# Allegro board clk104_board_file.brd
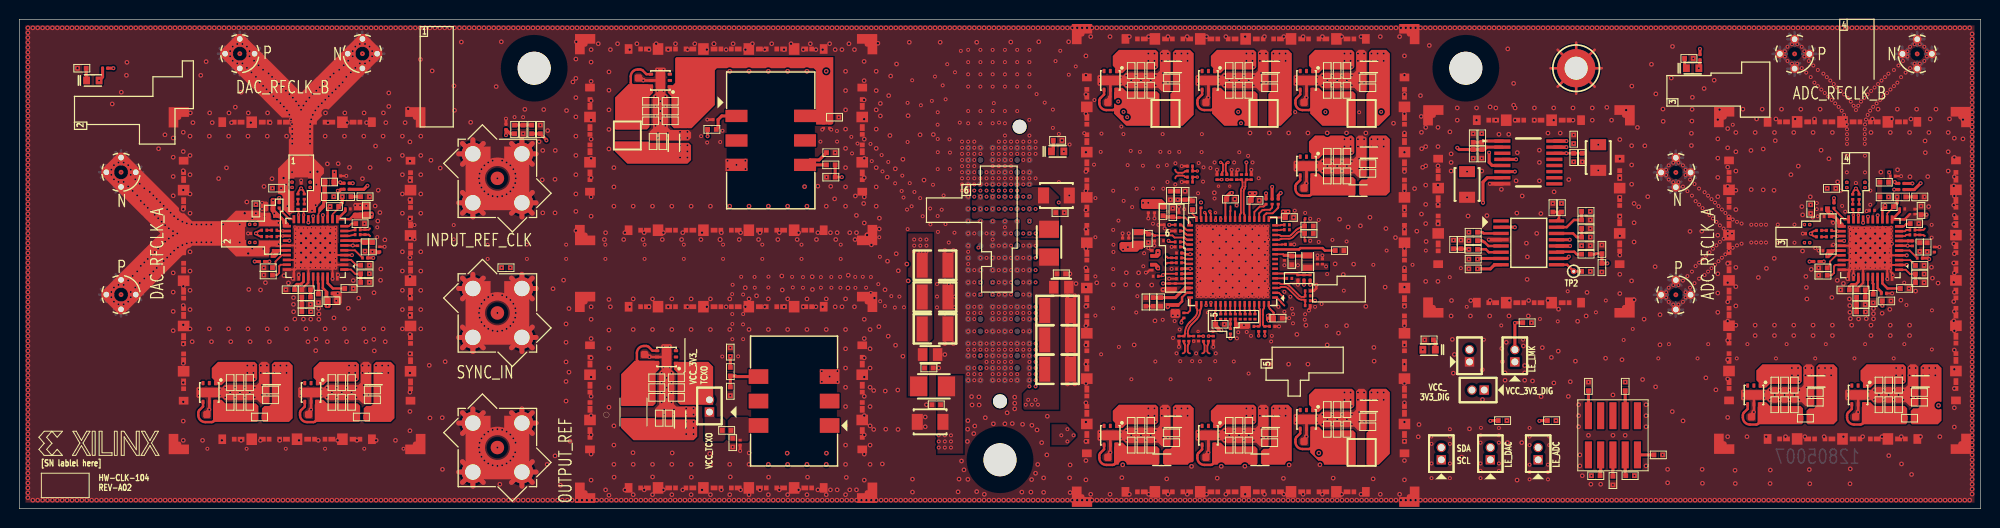
[diagram p0: board, top side]
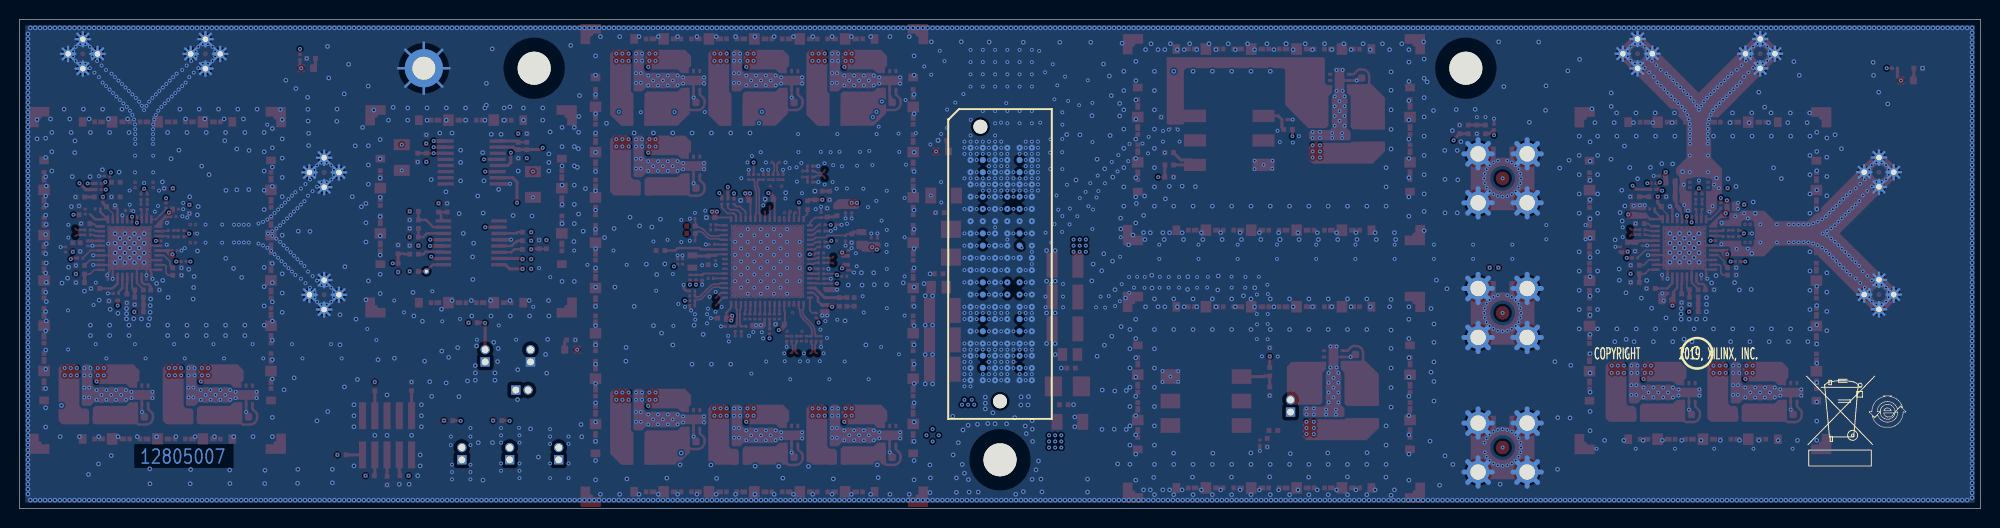
[diagram p1: board, bottom side, seen from below]

Outline 203.2 x 50.8 mm; copper layers: TOP, L02_CLK, L03_GND, L04_SIGNAL, L05_GND, L06_PWR, L07_GND, L08_PWR, L09_GND, L10_SIGNAL, L11_GND, BOTTOM. Coordinates in mm from the lower left corner of the outline.
Outline path: 0,50.8 203.2,50.8 203.2,0 0,0 0,50.8

## Design rules (mm)
constraint set DEFAULT: min track width 0.318
net group ADC_REFCLK_N: nets ADC_REFCLK_N DCLK_OUT12_N
net group ADC_REFCLK_P: nets ADC_REFCLK_P DCLK_OUT12_P
net group AMS_SYSREF_N: nets AMS_SYSREF_N SDCLK_OUT3_N
net group AMS_SYSREF_P: nets AMS_SYSREF_P SDCLK_OUT3_P
net group CLK_4208_IN0_CMOS: nets CLK_4208_IN0_CMOS CLK_IN1
net group CLK_4208_IN1_CMOS: nets CLK_4208_IN1_CMOS TCXO_OUT
net group CSB_H: nets CSB_H H_LE
net group DAC_REFCLK_N: nets DAC_REFCLK_N DCLK_OUT6_N
net group DAC_REFCLK_P: nets DAC_REFCLK_P DCLK_OUT6_P
net group DDR_PLY_CAP_SYNC_N: nets DCLK_OUT7_N DDR_PLY_CAP_SYNC_N
net group DDR_PLY_CAP_SYNC_P: nets DCLK_OUT7_P DDR_PLY_CAP_SYNC_P
net group LE_2594_ADC: nets LE_2594_ADC N21810055
net group LE_2594_DAC: nets LE_2594_DAC N21398582
net group LE_LMK04828: nets LE_LMK04828 N21879442
net group LMK04208_CPO2: nets LMK04208_CPO2 N20993068
net group LMK_MUXOUT: nets LMK_MUXOUT N21879514
net group MG5: nets SDCLK_OUT1_P SDCLK_OUT5_P
net group MUXOUT_RF2: nets MUXOUT_RF2 N21119393
net group N21162823: nets N21162823 N21825725
net group PL_CLK_N: nets DCLK_OUT8_N PL_CLK_N
net group PL_CLK_P: nets DCLK_OUT8_P PL_CLK_P
net group PL_SYSREF_N: nets PL_SYSREF_N SDCLK_OUT9_N
net group PL_SYSREF_P: nets PL_SYSREF_P SDCLK_OUT9_P
net group REFIN_2592B_IN_N: nets REFIN_2592B_IN_N REFIN_RF2_N
net group REFIN_2592B_IN_P: nets REFIN_2592B_IN_P REFIN_RF2_P
net group REFIN_RF1_IN_N: nets REFIN_RF1_IN_N REFIN_RF1_N
net group REFIN_RF1_IN_P: nets REFIN_RF1_IN_P REFIN_RF1_P
net group RF1_ADC_SYNC: nets RF1_ADC_SYNC RF1_ADC_SYNC_IN
net group RF2_ADC_SYNC_IN: nets RF2_ADC_SYNC_IN RF2_DAC_SYNC
net group SDCLK_OUT11: nets SDCLK_OUT11_N SDCLK_OUT11_P
net group SFP_REC_CLK_N: nets N22148580 SFP_REC_CLK_N
net group SFP_REC_CLK_P: nets N22148573 SFP_REC_CLK_P
net group STATUS_4208: nets N22068626 STATUS_4208
net group MUXOUT_RF1: nets MUXOUT_RF1 N21119355 RF_ADC_MUXOUT
net group OSCIN_4208_CMOS: nets OSCIN_4208_CMOS VCXO_OUT VCXO_OUT_ATT
net group RF1_OUTA_N: nets N21995692 RF1_2594_A_N RF1_OUTA_N
net group RF1_OUTA_P: nets N21995695 RF1_2594_A_P RF1_OUTA_P
net group RF1_OUTB_N: nets N22000306 RF1_2594_B_N RF1_OUTB_N
net group RF1_OUTB_P: nets N22000213 RF1_2594_B_P RF1_OUTB_P
net group RF2_OUTA_N: nets N22010941 RF2_2594_A_N RF2_OUTA_N
net group RF2_OUTA_P: nets N22010852 RF2_2594_A_P RF2_OUTA_P
net group RF2_OUTB_N: nets N22011759 RF2_2594_B_N RF2_OUTB_N
net group RF2_OUTB_P: nets N22011666 RF2_2594_B_P RF2_OUTB_P
net group SDCLK_OUT1_: nets SDCLK_OUT1_N
net group SDCLK_OUT5: nets SDCLK_OUT5_N
net group SE_CLKS: nets SDCLK11_AC
net group SYNC_IN: nets N22148641 N22917062 SYNC_IN SYNC_IN_SMA
net group VTUEN_VCXO: nets LMK04208_CPO1 N20993838 VTUEN_VCXO VTUNE_LMK
net group VTUNE_RF1: nets N21807365 N21807371 N21807441 VTUNE_RF1
net group VTUNE_RF2: nets N21808854 N21808860 N21808930 VTUNE_RF2

## Placement (name value [footprint] x y rotation side)
C1  0.1UF  [CAPC100X50X55]  162.31 27.3 0 top
C5  22UF  [CAPC320X160X180]  94.36 9.02 180 top
C6  100UF  [CAPC320X250X280]  94.87 21.97 0 top
C7  10UF  [CAPC200X125X155]  94.36 16 0 top
C8  0.1UF  [CAPC60X30X40]  127.13 34.42 90 top
C9  0.1UF  [CAPC60X30X40]  126.62 34.42 90 top
C21  0.1UF  [CAPC60X30X40]  134.49 25.65 90 top
C23  0.1UF  [CAPC60X30X40]  131.06 26.04 270 top
C24  0.1UF  [CAPC60X30X40]  128.4 18.67 270 top
C25  0.1UF  [CAPC60X30X40]  129.03 18.67 270 top
C26  0.1UF  [CAPC60X30X40]  117.6 30.99 270 top
C27  0.1UF  [CAPC60X30X40]  120.14 30.48 90 top
C31  0.1UF  [CAPC60X30X40]  117.6 28.07 270 top
C37  0.1UF  [CAPC60X30X40]  120.02 27.18 0 top
C39  0.1UF  [CAPC60X30X40]  125.48 18.41 270 top
C40  0.1UF  [CAPC60X30X40]  120.14 24.89 180 top
C41  1UF  [CAPC100X50X50]  84.46 40.64 0 top
C42  0.1UF  [CAPC60X30X40]  83.95 39.75 270 top
C43  1000PF  [0201]  83.31 39.75 270 top
C44  0.1UF  [CAPC60X30X40]  120.14 23.88 180 top
C45  0.1UF  [CAPC60X30X40]  117.35 25.02 270 top
C47  0.1UF  [CAPC60X30X40]  120.14 24.38 0 top
C48  0.1UF  [CAPC60X30X40]  119.76 23.11 270 top
C49  2200PF  [CAPC100X50X55]  117.47 21.46 270 top
C50  22PF  [CAPC100X50X56]  118.24 21.46 270 top
C51  10 uF  [CAPC100X50X70]  136.78 26.8 0 top
C52  0.1UF  [CAPC60X30X40]  131.44 27.43 0 top
C53  100pF  [CAPC60X30X33]  72.14 40.39 180 top
C54  0.68uF  [CAPC100X50X55]  120.02 32.51 90 top
C55  0.1UF  [CAPC100X50X55]  120.78 32.51 90 top
C56  0.1UF  [CAPC60X30X40]  120.02 20.83 270 top
C58  0.1UF  [CAPC60X30X40]  120.02 27.69 0 top
C60  0.1UF  [CAPC60X30X40]  120.02 29.46 0 top
C61  1UF  [CAPC100X50X50]  73.91 6.86 270 top
C62  0.1UF  [CAPC60X30X40]  74.68 6.86 270 top
C64  0.1UF  [CAPC60X30X40]  120.02 28.83 0 top
C67  0.1UF  [CAPC60X30X40]  186.98 31.09 180 top
C69  0.1UF  [CAPC60X30X40]  187.24 30.33 180 top
C70  0.1UF  [CAPC60X30X40]  187.82 30.05 270 top
C71  100pF  [CAPC60X30X33]  185.23 27.61 180 top
C74  0.1UF  [CAPC60X30X40]  193.17 22.35 0 top
C76  0.1UF  [CAPC60X30X40]  195.07 31.11 0 top
C78  0.1UF  [CAPC60X30X40]  187.82 27.05 90 top
C79  0.1UF  [CAPC60X30X40]  187.11 26.77 180 top
C80  0.1UF  [CAPC60X30X40]  191.94 30.97 180 top
C81  100pF  [CAPC60X30X33]  185.23 29.49 180 top
C82  0.1UF  [CAPC60X30X40]  196.13 27.54 270 top
C83  0.1UF  [CAPC60X30X40]  196.38 30.84 90 top
C84  1UF  [CAPC100X50X50]  196.34 29.59 180 top
C85  10 uF  [CAPC100X50X70]  192.06 21.82 90 top
C86  1UF  [CAPC100X50X50]  195.33 22.86 180 top
C91  10 uF  [CAPC100X50X70]  186.86 24.23 0 top
C92  10 uF  [CAPC100X50X70]  196.89 25.25 180 top
C93  1UF  [CAPC100X50X50]  186.86 25 0 top
C94  10 uF  [CAPC100X50X70]  189.14 22.71 0 top
C95  0.1UF  [CAPC60X30X40]  196.13 28.43 180 top
C96  0.1UF  [CAPC60X30X40]  196.13 28.93 180 top
C111  100pF  [CAPC60X30X33]  24.16 27.64 180 top
C115  0.1UF  [CAPC60X30X40]  26.75 30.08 270 top
C117  0.1UF  [CAPC60X30X40]  25.91 31.11 180 top
C118  100pF  [CAPC60X30X33]  24.16 29.51 180 top
C119  0.1UF  [CAPC60X30X40]  26.16 30.35 180 top
C123  0.1UF  [CAPC60X30X40]  26.04 26.8 180 top
C125  0.1UF  [CAPC60X30X40]  30.86 30.99 180 top
C128  0.1UF  [CAPC60X30X40]  26.75 27.08 90 top
C129  0.1UF  [CAPC60X30X40]  34.04 31.11 0 top
C130  0.1UF  [CAPC60X30X40]  35.05 27.56 270 top
C131  0.1UF  [CAPC60X30X40]  32.13 22.35 0 top
C132  0.1UF  [CAPC60X30X40]  35.31 30.86 90 top
C133  1UF  [CAPC100X50X50]  35.31 29.59 180 top
C134  10 uF  [CAPC100X50X70]  30.99 21.84 90 top
C135  1UF  [CAPC100X50X50]  34.16 22.86 180 top
C140  10 uF  [CAPC100X50X70]  25.78 24.26 0 top
C141  10 uF  [CAPC100X50X70]  35.81 25.27 180 top
C142  1UF  [CAPC100X50X50]  25.78 25.02 0 top
C143  10 uF  [CAPC100X50X70]  28.07 22.73 0 top
C144  0.1UF  [CAPC60X30X40]  35.05 28.45 180 top
C145  0.1UF  [CAPC60X30X40]  35.05 28.96 180 top
C163  1UF  [CAPC100X50X50]  107.82 30.73 0 top
C165  10UF  [CAPC200X125X155]  107.95 22.99 0 top
C166  1UF  [CAPC100X50X50]  107.95 24.38 0 top
C185  0.01UF  [CAPC60X30X33]  135 25.65 90 top
C186  1UF  [CAPC100X50X50]  131.83 25.78 270 top
C187  0.01UF  [CAPC60X30X33]  116.97 30.99 270 top
C188  10 uF  [CAPC100X50X70]  119.51 30.73 90 top
C190  0.01UF  [CAPC60X30X33]  114.3 27.81 90 top
C191  1UF  [CAPC100X50X50]  116.97 28.07 270 top
C196  0.01UF  [CAPC60X30X33]  117.35 26.54 90 top
C198  0.01UF  [CAPC60X30X33]  120.14 26.54 180 top
C200  0.01UF  [CAPC60X30X33]  119.13 23.11 270 top
C202  0.01UF  [CAPC60X30X33]  119.51 20.83 270 top
C278  100pF  [CAPC60X30X33]  185.33 28.55 180 top
C279  0.1UF  [CAPC100X50X55]  161.04 38.35 90 top
C280  0.1UF  [CAPC60X30X40]  133.48 21.59 0 top
C281  0.1UF  [CAPC60X30X40]  133.48 22.1 0 top
C282  0.1UF  [CAPC60X30X40]  125.09 34.42 90 top
C283  0.1UF  [CAPC60X30X40]  124.59 34.42 90 top
C284  0.1UF  [CAPC60X30X40]  122.68 17.65 270 top
C285  0.1UF  [CAPC60X30X40]  123.19 17.65 270 top
C302  100pF  [CAPC60X30X33]  189.33 33.59 90 top
C303  100pF  [CAPC60X30X33]  190.27 33.49 90 top
C305  100pF  [CAPC60X30X33]  191.21 33.59 90 top
C306  390PF  [0402]  193.71 31.35 180 top
C307  1800PF  [CAPC100X50X55]  190.79 22.71 0 top
C308  1800PF  [CAPC100X50X55]  190.79 21.19 180 top
C309  0.068UF  [CAPC100X50X55]  194.98 32.36 0 top
C314  100pF  [CAPC60X30X33]  28.26 33.61 90 top
C317  100pF  [CAPC60X30X33]  30.14 33.61 90 top
C318  0.068UF  [CAPC100X50X55]  33.91 32.38 0 top
C319  390PF  [0402]  32.64 31.37 180 top
C320  1800PF  [CAPC100X50X55]  29.72 22.73 0 top
C321  1800PF  [CAPC100X50X55]  29.72 21.21 180 top
C322  2.2UF  [CAPC100X50X55]  139.7 8.51 180 top
C323  0.22UF  [CAPC100X50X55]  139.7 9.53 180 top
C324  2.2UF  [CAPC100X50X55]  136.53 8.26 90 top
C325  0.22UF  [CAPC100X50X55]  137.54 8.26 90 top
C326  0.22UF  [CAPC100X50X55]  136.53 10.29 270 top
C327  2.2UF  [CAPC100X50X55]  137.54 10.29 270 top
C328  2.2UF  [CAPC100X50X55]  129.54 43.69 180 top
C329  0.22UF  [CAPC100X50X55]  129.54 44.7 180 top
C330  2.2UF  [CAPC100X50X55]  126.36 43.43 90 top
C331  0.22UF  [CAPC100X50X55]  127.38 43.43 90 top
C332  0.22UF  [CAPC100X50X55]  126.36 45.47 270 top
C333  2.2UF  [CAPC100X50X55]  127.38 45.47 270 top
C334  0.22UF  [CAPC100X50X55]  139.7 44.7 180 top
C335  2.2UF  [CAPC100X50X55]  136.53 43.43 90 top
C336  2.2UF  [CAPC100X50X55]  139.7 43.69 180 top
C337  0.22UF  [CAPC100X50X55]  137.54 43.43 90 top
C338  0.22UF  [CAPC100X50X55]  136.53 45.47 270 top
C339  2.2UF  [CAPC100X50X55]  137.54 45.47 270 top
C340  0.22UF  [CAPC100X50X55]  67.44 41.27 180 top
C341  2.2UF  [CAPC100X50X55]  67.44 40.26 180 top
C342  2.2UF  [CAPC100X50X55]  65.66 38.1 90 top
C343  0.22UF  [CAPC100X50X55]  66.67 38.1 90 top
C344  2.2UF  [CAPC100X50X55]  65.41 41.27 0 top
C345  0.22UF  [CAPC100X50X55]  65.41 40.26 0 top
C346  2.2UF  [CAPC100X50X55]  139.7 34.8 180 top
C347  0.22UF  [CAPC100X50X55]  139.7 35.81 180 top
C348  2.2UF  [CAPC100X50X55]  136.53 34.54 90 top
C349  0.22UF  [CAPC100X50X55]  137.54 34.54 90 top
C350  0.22UF  [CAPC100X50X55]  136.53 36.58 270 top
C351  2.2UF  [CAPC100X50X55]  137.54 36.58 270 top
C352  2.2UF  [CAPC100X50X55]  66.29 9.4 90 top
C353  0.22UF  [CAPC100X50X55]  67.31 9.4 90 top
C354  2.2UF  [CAPC100X50X55]  66.04 12.57 0 top
C355  0.22UF  [CAPC100X50X55]  66.04 11.56 0 top
C356  0.22UF  [CAPC100X50X55]  68.07 12.57 180 top
C357  2.2UF  [CAPC100X50X55]  68.07 11.56 180 top
C358  1UF  [CAPC100X50X50]  185.59 31.09 90 top
C359  1UF  [CAPC100X50X50]  187.74 33.25 180 top
C360  1UF  [CAPC100X50X50]  193.46 21.57 180 top
C361  1UF  [CAPC100X50X50]  197.02 30.97 270 top
C362  2.2UF  [CAPC100X50X55]  186.06 11.05 180 top
C363  0.22UF  [CAPC100X50X55]  186.06 12.06 180 top
C364  2.2UF  [CAPC100X50X55]  182.88 10.79 90 top
C365  0.22UF  [CAPC100X50X55]  183.9 10.79 90 top
C366  0.22UF  [CAPC100X50X55]  182.88 12.83 270 top
C367  2.2UF  [CAPC100X50X55]  183.9 12.83 270 top
C368  2.2UF  [CAPC100X50X55]  196.85 11.05 180 top
C369  0.22UF  [CAPC100X50X55]  196.85 12.06 180 top
C370  2.2UF  [CAPC100X50X55]  193.68 10.79 90 top
C371  0.22UF  [CAPC100X50X55]  194.69 10.79 90 top
C372  0.22UF  [CAPC100X50X55]  193.68 12.83 270 top
C373  2.2UF  [CAPC100X50X55]  194.69 12.83 270 top
C374  100pF  [CAPC60X30X33]  24.26 28.57 180 top
C376  1UF  [CAPC100X50X50]  24.51 31.11 90 top
C377  1UF  [CAPC100X50X50]  26.67 33.27 180 top
C378  100pF  [CAPC60X30X33]  29.2 33.51 90 top
C379  1UF  [CAPC100X50X50]  35.94 30.99 270 top
C380  1UF  [CAPC100X50X50]  32.38 21.59 180 top
C382  2.2UF  [CAPC100X50X55]  26.04 11.3 180 top
C383  0.22UF  [CAPC100X50X55]  26.04 12.32 180 top
C384  2.2UF  [CAPC100X50X55]  22.86 11.05 90 top
C385  0.22UF  [CAPC100X50X55]  23.88 11.05 90 top
C386  0.22UF  [CAPC100X50X55]  22.86 13.08 270 top
C387  2.2UF  [CAPC100X50X55]  23.88 13.08 270 top
C388  2.2UF  [CAPC100X50X55]  36.58 11.3 180 top
C389  0.22UF  [CAPC100X50X55]  36.58 12.32 180 top
C390  2.2UF  [CAPC100X50X55]  33.4 11.05 90 top
C391  0.22UF  [CAPC100X50X55]  34.42 11.05 90 top
C392  0.22UF  [CAPC100X50X55]  33.4 13.08 270 top
C393  2.2UF  [CAPC100X50X55]  34.42 13.08 270 top
C394  0.1UF  [CAPC60X30X40]  120.65 17.65 270 top
C395  0.1UF  [CAPC60X30X40]  121.16 17.65 270 top
C396  0.1UF  [CAPC60X30X40]  121.28 35.05 180 top
C397  0.1UF  [CAPC60X30X40]  121.28 34.42 180 top
C398  1UF  [CAPC100X50X50]  130.4 19.78 0 top
C399  1UF  [CAPC100X50X50]  125.48 32.13 0 top
C400  1UF  [CAPC100X50X50]  131.57 30.23 0 top
C401  1UF  [CAPC100X50X50]  128.02 32 0 top
C402  1UF  [CAPC100X50X50]  124.4 19.15 0 top
C403  0.1UF  [CAPC60X30X40]  120.14 26.04 0 top
C404  0.1UF  [CAPC60X30X40]  120.14 25.53 0 top
C405  0.1UF  [CAPC60X30X40]  131.32 28.96 0 top
C406  0.1UF  [CAPC60X30X40]  131.32 29.46 0 top
C407  0.1UF  [CAPC60X30X40]  124.46 19.94 270 top
C408  0.1UF  [CAPC60X30X40]  124.97 19.94 270 top
C409  0.1UF  [CAPC60X30X40]  127.51 19.94 270 top
C410  0.1UF  [CAPC60X30X40]  128.02 19.94 270 top
C411  1UF  [CAPC100X50X50]  95 10.79 180 top
C412  1UF  [CAPC100X50X50]  94.23 14.61 0 top
C413  22UF  [CAPC320X160X180]  107.44 32.51 0 top
C414  22UF  [CAPC320X160X180]  149.99 33.66 270 top
C415  22UF  [CAPC320X160X180]  163.58 36.45 270 top
C416  100UF  [CAPC320X250X280]  94.87 25.27 0 top
C417  100UF  [CAPC320X250X280]  94.87 18.67 0 top
C418  100UF  [CAPC320X250X280]  107.57 20.57 0 top
C419  100UF  [CAPC320X250X280]  107.57 17.53 0 top
C420  100UF  [CAPC320X250X280]  107.57 14.48 0 top
C421  4.7UF  [CAPC160X80X95]  139.83 10.67 180 top
C422  4.7UF  [CAPC100X50X70]  135.51 8.26 90 top
C423  4.7UF  [CAPC160X80X95]  139.83 45.85 180 top
C424  4.7UF  [CAPC100X50X70]  135.51 43.43 90 top
C425  4.7UF  [CAPC160X80X95]  129.67 45.85 180 top
C426  4.7UF  [CAPC100X50X70]  125.35 43.43 90 top
C427  4.7UF  [CAPC160X80X95]  139.83 36.96 180 top
C428  4.7UF  [CAPC100X50X70]  135.51 34.54 90 top
C429  4.7UF  [CAPC160X80X95]  67.82 37.97 90 top
C430  4.7UF  [CAPC100X50X70]  65.41 42.29 0 top
C431  4.7UF  [CAPC100X50X70]  67.44 42.29 180 top
C432  4.7UF  [CAPC160X80X95]  68.45 9.27 90 top
C433  4.7UF  [CAPC100X50X70]  66.04 13.59 0 top
C434  4.7UF  [CAPC100X50X70]  68.07 13.59 180 top
C435  4.7UF  [CAPC160X80X95]  186.18 13.21 180 top
C436  4.7UF  [CAPC100X50X70]  181.86 10.79 90 top
C437  4.7UF  [CAPC160X80X95]  196.98 13.21 180 top
C438  4.7UF  [CAPC100X50X70]  192.66 10.79 90 top
C439  4.7UF  [CAPC160X80X95]  26.16 13.46 180 top
C440  4.7UF  [CAPC100X50X70]  21.84 11.05 90 top
C441  4.7UF  [CAPC160X80X95]  36.7 13.46 180 top
C442  4.7UF  [CAPC100X50X70]  32.38 11.05 90 top
C443  4.7UF  [CAPC100X50X70]  135.51 10.29 270 top
C444  4.7UF  [CAPC100X50X70]  135.51 45.47 270 top
C445  4.7UF  [CAPC100X50X70]  125.35 45.47 270 top
C446  4.7UF  [CAPC100X50X70]  135.51 36.58 270 top
C447  4.7UF  [CAPC100X50X70]  181.86 12.83 270 top
C448  4.7UF  [CAPC100X50X70]  192.66 12.83 270 top
C449  4.7UF  [CAPC100X50X70]  21.84 13.08 270 top
C450  4.7UF  [CAPC100X50X70]  32.38 13.08 270 top
C451  0.1UF  [CAPC60X30X40]  198.41 26.9 90 top
C452  0.1UF  [CAPC60X30X40]  37.34 26.92 90 top
C453  4.7UF  [CAPC160X80X95]  129.67 9.02 180 top
C454  2.2UF  [CAPC100X50X55]  129.54 6.86 180 top
C455  0.22UF  [CAPC100X50X55]  129.54 7.87 180 top
C456  4.7UF  [CAPC100X50X70]  125.35 6.6 90 top
C457  2.2UF  [CAPC100X50X55]  126.36 6.6 90 top
C458  0.22UF  [CAPC100X50X55]  127.38 6.6 90 top
C459  0.22UF  [CAPC100X50X55]  126.36 8.64 270 top
C460  2.2UF  [CAPC100X50X55]  127.38 8.64 270 top
C461  4.7UF  [CAPC100X50X70]  125.35 8.64 270 top
C462  4.7UF  [CAPC160X80X95]  119.51 9.02 180 top
C463  2.2UF  [CAPC100X50X55]  119.38 6.86 180 top
C464  0.22UF  [CAPC100X50X55]  119.38 7.87 180 top
C465  4.7UF  [CAPC100X50X70]  115.19 6.6 90 top
C466  4.7UF  [CAPC160X80X95]  119.51 45.85 180 top
C467  2.2UF  [CAPC100X50X55]  119.38 43.69 180 top
C468  0.22UF  [CAPC100X50X55]  119.38 44.7 180 top
C469  4.7UF  [CAPC100X50X70]  115.19 43.43 90 top
C470  2.2UF  [CAPC100X50X55]  116.2 43.43 90 top
C471  0.22UF  [CAPC100X50X55]  117.22 43.43 90 top
C472  0.22UF  [CAPC100X50X55]  116.2 45.47 270 top
C473  2.2UF  [CAPC100X50X55]  116.2 6.6 90 top
C474  0.22UF  [CAPC100X50X55]  117.22 6.6 90 top
C475  0.22UF  [CAPC100X50X55]  116.2 8.64 270 top
C476  2.2UF  [CAPC100X50X55]  117.22 8.64 270 top
C477  4.7UF  [CAPC100X50X70]  115.19 8.64 270 top
C478  2.2UF  [CAPC100X50X55]  117.22 45.47 270 top
C479  4.7UF  [CAPC100X50X70]  115.19 45.47 270 top
C480  0.1UF  [CAPC60X30X40]  114.94 27.81 90 top
C482  0.1UF  [CAPC60X30X40]  194.09 34.52 0 top
C483  10 uF  [CAPC100X50X70]  193.21 32.36 0 top
C484  0.1UF  [CAPC60X30X40]  33.02 34.54 0 top
C485  10 uF  [CAPC100X50X70]  32.13 32.38 0 top
C486  10 uF  [CAPC100X50X70]  196.89 27.16 270 top
C487  10 uF  [CAPC100X50X70]  35.81 27.18 270 top
DS1  LED-GRN-SMT  [LED_0603]  146.05 16.51 180 top
DS2  LED-GRN-SMT  [LED_0603]  173.35 45.72 0 top
DS3  LED-GRN-SMT  [LED_0603]  7.62 44.45 0 top
DS4  LED-GRN-SMT  [LED_0603]  107.57 37.08 0 top
E2  10-109-3-01  [TP_CONCORD_10_109]  161.29 45.72 0 top
J1  -  [CON_SAMTEC_LPAM_20]  101.6 25.4 270 bottom
J10  32K10K-400L5  [32K10K_400_3M_73251_DUAL]  49.53 6.35 180 top
J11  32K10K-400L5  [32K10K_400_3M_73251_DUAL]  49.53 34.29 180 top
J20  TM14-0084-00  [CONN_CARLISE_TM14_0084_00]  10.54 22.23 135 top
J21  TM14-0084-00  [CONN_CARLISE_TM14_0084_00]  10.54 34.92 45 top
J24  HDR 1x2 0.05/1.27MM PITCH  [HDR_1X2_1P27]  71.5 10.03 90 top
J26  HDR 1x2 0.05/1.27MM PITCH  [HDR_1X2_1P27]  150.24 15.24 90 top
J27  TM14-0084-00  [CONN_CARLISE_TM14_0084_00]  171.62 22.2 135 top
J28  TM14-0084-00  [CONN_CARLISE_TM14_0084_00]  171.62 34.9 45 top
J29  TM14-0084-00  [CONN_CARLISE_TM14_0084_00]  183.92 47.21 45 top
J30  TM14-0084-00  [CONN_CARLISE_TM14_0084_00]  196.62 47.21 315 top
J31  TM14-0084-00  [CONN_CARLISE_TM14_0084_00]  22.85 47.23 45 top
J32  TM14-0084-00  [CONN_CARLISE_TM14_0084_00]  35.55 47.23 315 top
J33  -  [CON_SAMTEC_FTSH_10]  165.1 7.62 180 top
J34  HDR 1x2 0.05/1.27MM PITCH  [HDR_1X2_1P27]  151.76 12.32 180 top
J36  HDR 1x2 0.05/1.27MM PITCH  [HDR_1X2_1P27]  157.35 5.08 90 top
J37  HDR 1x2 0.05/1.27MM PITCH  [HDR_1X2_1P27]  152.4 5.08 90 top
J38  HDR 1x2 0.05/1.27MM PITCH  [HDR_1X2_1P27]  154.94 15.24 90 top
J41  HDR 1x2 0.05/1.27MM PITCH  [HDR_1X2_1P27]  147.32 5.08 90 top
J42  32K10K-400L5  [32K10K_400_3M_73251_DUAL]  49.53 20.32 180 top
L3  FERRITE-160  [BEAD_LAIRD_1206]  94.61 12.7 180 top
L5  47 nH  [INDC180X112X102]  133.48 25.65 90 top
L6  15NH  [0402]  118.49 30.86 270 top
L8  47 nH  [INDC180X112X102]  115.95 28.07 90 top
L11  47 nH  [INDC180X112X102]  128.52 5.08 180 top
L12  47 nH  [INDC180X112X102]  118.36 5.08 180 top
L13  1.9 uH  [IND_COILCRAFT_1008AF_192XJLB]  118.75 41.02 180 top
L15  1.9 uH  [IND_COILCRAFT_1008AF_192XJLB]  139.06 5.84 180 top
L16  1.9 uH  [IND_COILCRAFT_1008AF_192XJLB]  128.91 41.02 180 top
L17  1.9 uH  [IND_COILCRAFT_1008AF_192XJLB]  139.06 41.02 180 top
L18  1.9 uH  [IND_COILCRAFT_1008AF_192XJLB]  62.99 38.73 90 top
L19  47 nH  [INDC180X112X102]  138.68 33.02 180 top
L20  10 uH  [IND_COILCRAFT_1008AF_103XJLC]  63.63 10.03 90 top
L21  1.2 nH  [INDC58X46X45]  187.49 28.22 0 top
L22  1.2 nH  [INDC58X46X45]  187.49 28.88 0 top
L23  1.2 nH  [INDC58X46X45]  189.94 31.33 270 top
L24  1.2 nH  [INDC58X46X45]  190.6 31.33 270 top
L25  36NH  [0402]  185.04 9.4 180 top
L26  36NH  [0402]  195.83 9.4 180 top
L27  1.2 nH  [INDC58X46X45]  26.42 28.24 0 top
L28  1.2 nH  [INDC58X46X45]  26.42 28.91 0 top
L29  1.2 nH  [INDC58X46X45]  28.87 31.35 270 top
L30  1.2 nH  [INDC58X46X45]  29.53 31.35 270 top
L31  6.2NH  [0402]  24.89 9.53 180 top
L32  6.2NH  [0402]  35.43 9.53 180 top
L33  FERRITE-160  [BEAD_LAIRD_1206]  106.68 27.56 270 top
L34  15NH  [0402]  197.65 27.16 90 top
L35  15NH  [0402]  36.58 27.18 90 top
L36  15NH  [0402]  193.21 33.89 180 top
L37  15NH  [0402]  32.13 33.91 180 top
MH1  -  [MH_220HN135]  149.86 45.72 0 top
MH2  -  [MH_220HN135]  101.6 5.08 0 top
MH3  -  [MH_220HN135]  53.34 45.72 0 top
NOREF  -  []  -71.36 103.71 0 top
NOREF#2  -  []  8.33 105.99 0 top
NOREF#3  -  []  3.76 38.79 0 top
NOREF#4  -  []  0 0 90 top
NOREF#5  -  []  0 50.8 0 top
R1  10.0K  [RESC100X50X40]  150.62 24.89 0 top
R2  10.0K  [RESC100X50X40]  150.62 25.91 0 top
R3  10.0K  [RESC100X50X40]  162.31 24.64 180 top
R4  2.00K  [RESC100X50X40]  150.62 28.7 0 top
R5  10.0K  [RESC100X50X40]  159.77 31.24 270 top
R6  10.0K  [RESC100X50X40]  162.31 30.86 180 top
R7  10.0K  [RESC100X50X40]  162.31 28.19 180 top
R8  10.0K  [RESC100X50X40]  158.88 31.24 90 top
R9  10.0K  [RESC100X50X40]  162.31 29.97 0 top
R10  10.0K  [RESC100X50X40]  162.31 29.08 0 top
R12  10.0K  [RESC100X50X40]  148.59 27.43 270 top
R13  10.0K  [RESC100X50X40]  163.96 25.02 90 top
R19  10.0K  [RESC100X50X40]  149.35 27.43 90 top
R20  10.0K  [RESC100X50X40]  163.96 26.92 90 top
R22  240  [RESC60X30X23]  127.64 34.42 90 top
R23  240  [RESC60X30X23]  126.11 34.42 90 top
R26  240  [RESC60X30X23]  133.48 27.81 0 top
R27  240  [RESC60X30X23]  133.48 30.1 0 top
R33  240  [RESC60X30X23]  127.64 18.92 180 top
R34  240  [RESC60X30X23]  129.79 18.92 0 top
R48  0  [RESC60X30X26]  125.48 19.94 270 top
R49  240  [RESC60X30X23]  125.73 19.18 0 top
R51  38.3  [0402]  84.07 35.69 0 top
R52  150  [0402]  84.07 36.96 0 top
R53  150  [0402]  84.07 34.42 180 top
R54  49.9  [RESC60X30X23]  117.73 24.13 180 top
R55  0  [RESC100X50X40]  71.75 39.37 180 top
R56  0  [RESC100X50X40]  121.54 31.5 270 top
R57  2.7K  [RESC100X50X40]  116.71 21.46 90 top
R58  39 kOhms  [RESC100X50X40]  119.25 32.51 270 top
R59  17.8  [0402]  53.09 39.37 270 top
R60  49.9  [RESC60X30X23]  50.42 39.62 90 top
R61  270  [RESC100X50X40]  52.2 39.37 270 top
R62  270  [RESC100X50X40]  53.98 39.37 90 top
R63  150  [0402]  73.66 12.19 270 top
R64  0  [RESC100X50X40]  73.28 8.13 0 top
R65  150  [0402]  73.66 16.26 90 top
R66  38.3  [0402]  73.66 14.22 90 top
R67  49.9  [RESC60X30X23]  118.87 29.46 180 top
R73  100  [RESC60X30X26]  196.89 28.68 90 top
R107  100  [RESC60X30X26]  35.81 28.7 90 top
R109  330  [RESC100X50X40]  146.05 17.53 180 top
R110  330  [RESC100X50X40]  172.97 46.74 0 top
R112  330  [RESC100X50X40]  6.48 45.72 180 top
R113  12.0K  [0201]  8.89 45.72 0 top
R147  330  [RESC100X50X40]  107.57 38.23 0 top
R148  10.0K  [RESC100X50X40]  196.89 24.36 180 top
R149  10.0K  [RESC100X50X40]  196.89 23.47 180 top
R150  10.0K  [RESC100X50X40]  35.81 24.38 180 top
R151  10.0K  [RESC100X50X40]  35.81 23.5 180 top
R153  240  [RESC60X30X23]  125.98 19.94 270 top
R155  49.9  [RESC60X30X23]  118.81 27.81 180 top
R158  47.5K  [RESC100X50X40]  158.75 9.14 180 top
R159  47.5K  [RESC100X50X40]  153.67 9.14 180 top
R160  47.5K  [RESC100X50X40]  156.21 19.3 180 top
R171  0  [RESC60X30X26]  120.65 20.07 270 top
R172  12.0K  [0201]  130.43 31.88 90 top
R173  12.0K  [0201]  129.79 31.88 90 top
R174  12.0K  [0201]  129.16 31.88 90 top
R176  12.0K  [0201]  186.18 25.65 180 top
R177  12.0K  [0201]  194.98 33.12 0 top
R178  12.0K  [0201]  194.98 33.76 0 top
R179  0  [RESC60X30X26]  188 31.47 90 top
R181  12.0K  [0201]  25.15 25.65 180 top
R182  12.0K  [0201]  33.91 33.15 0 top
R183  12.0K  [0201]  33.91 33.78 0 top
R184  0  [RESC60X30X26]  26.92 31.5 90 top
R215  49.9  [RESC100X50X40]  150.62 27.81 0 top
R216  49.9  [RESC100X50X40]  150.62 26.92 0 top
R217  49.9  [RESC100X50X40]  162.31 26.42 180 top
R218  10.0K  [RESC100X50X40]  151.51 38.48 270 top
R219  10.0K  [RESC100X50X40]  161.04 36.45 90 top
R220  10.0K  [RESC100X50X40]  150.62 36.83 90 top
R221  10.0K  [RESC100X50X40]  150.62 38.48 90 top
R222  10.0K  [RESC100X50X40]  161.93 36.45 270 top
R223  10.0K  [RESC100X50X40]  151.51 36.83 270 top
R224  240  [RESC60X30X23]  133.48 21.08 0 top
R225  240  [RESC60X30X23]  133.48 22.61 0 top
R226  240  [RESC60X30X23]  125.6 34.42 90 top
R227  240  [RESC60X30X23]  124.08 34.42 90 top
R228  12.0K  [0201]  122.43 31.5 90 top
R229  240  [RESC60X30X23]  122.17 17.65 270 top
R230  240  [RESC60X30X23]  123.7 17.65 270 top
R233  0  [RESC100X50X40]  190.79 21.95 180 top
R234  18  [0402]  190.79 20.42 0 top
R235  68.1  [0402]  196.89 32.36 0 top
R236  12.0K  [0201]  174.12 46.86 90 top
R239  0  [RESC100X50X40]  29.72 21.97 180 top
R240  18  [0402]  29.72 20.45 0 top
R241  68.1  [0402]  35.81 32.38 0 top
R242  0  [RESC100X50X40]  169.8 5.59 0 top
R243  0  [RESC100X50X40]  166.37 12.7 270 top
R244  0  [RESC100X50X40]  166.88 3.43 0 top
R245  0  [RESC100X50X40]  163.32 3.43 180 top
R246  0  [RESC100X50X40]  162.56 12.7 270 top
R247  0  [RESC100X50X40]  165.1 2.92 90 top
R249  24.9  [0201]  186.45 28.22 0 top
R252  24.9  [0201]  186.45 28.88 0 top
R255  24.9  [0201]  189.94 32.37 270 top
R258  24.9  [0201]  190.6 32.37 270 top
R261  24.9  [0201]  25.37 28.24 0 top
R264  24.9  [0201]  25.37 28.91 0 top
R267  24.9  [0201]  28.87 32.39 270 top
R270  24.9  [0201]  29.53 32.39 270 top
R272  240  [RESC60X30X23]  120.14 17.65 270 top
R273  240  [RESC60X30X23]  121.67 17.65 270 top
R274  240  [RESC60X30X23]  121.28 35.56 180 top
R275  240  [RESC60X30X23]  121.28 33.91 180 top
R276  0  [RESC60X30X26]  133.1 24 90 top
R277  100  [RESC60X30X26]  119.38 25.78 270 top
R278  0  [RESC60X30X26]  131.57 23.9 180 top
R279  0  [RESC60X30X26]  126.49 19.94 90 top
R280  0  [RESC60X30X26]  127 19.94 90 top
R281  0  [RESC100X50X40]  133.6 28.57 0 top
R282  0  [RESC100X50X40]  133.6 29.34 0 top
R283  0  [RESC60X30X26]  196.89 26.01 180 top
R284  0  [RESC60X30X26]  35.81 26.04 180 top
R285  49.9  [RESC60X30X23]  132.46 24 270 top
R286  0  [RESC100X50X40]  51.31 39.37 90 top
R287  0  [RESC60X30X26]  133.73 24 90 top
R288  0  [RESC100X50X40]  50.42 25.02 0 top
RFC1  S0981-46R  [RFI_SHLD_S0981_46R]  59.12 28.91 0 top
RFC2  S0981-46R  [RFI_SHLD_S0981_46R]  87.33 28.91 90 top
RFC3  S0981-46R  [RFI_SHLD_S0981_46R]  87.33 47.71 180 top
RFC4  S0981-46R  [RFI_SHLD_S0981_46R]  59.12 47.71 270 top
RFC5  S0981-46R  [RFI_SHLD_S0981_46R]  177.13 40.15 270 top
RFC6  S0981-46R  [RFI_SHLD_S0981_46R]  200.63 40.15 180 top
RFC7  S0981-46R  [RFI_SHLD_S0981_46R]  200.63 7.24 90 top
RFC8  S0981-46R  [RFI_SHLD_S0981_46R]  177.13 7.24 0 top
RFC9  S0981-46R  [RFI_SHLD_S0981_46R]  87.33 20.97 180 top
RFC10  S0981-46R  [RFI_SHLD_S0981_46R]  17.02 7.21 0 top
RFC11  S0981-46R  [RFI_SHLD_S0981_46R]  87.33 2.16 90 top
RFC12  S0981-46R  [RFI_SHLD_S0981_46R]  40.53 7.21 90 top
RFC13  S0981-46R  [RFI_SHLD_S0981_46R]  59.12 2.16 0 top
RFC14  S0981-46R  [RFI_SHLD_S0981_46R]  59.12 20.97 270 top
RFC15  S0981-46R  [RFI_SHLD_S0981_46R]  17.02 40.12 270 top
RFC16  S0981-46R  [RFI_SHLD_S0981_46R]  40.53 40.12 180 top
RFC17  S0981-46R  [RFI_SHLD_S0981_46R]  143.5 1.75 90 top
RFC18  S0981-46R  [RFI_SHLD_S0981_46R]  110.6 1.75 0 top
RFC19  S0981-46R  [RFI_SHLD_S0981_46R]  143.5 48.76 180 top
RFC20  S0981-46R  [RFI_SHLD_S0981_46R]  110.6 48.76 270 top
RFC21  S0981-46R  [RFI_SHLD_S0981_46R]  165.8 21.39 90 top
RFC22  S0981-46R  [RFI_SHLD_S0981_46R]  146.99 21.39 0 top
RFC23  S0981-46R  [RFI_SHLD_S0981_46R]  165.8 40.33 180 top
RFC24  S0981-46R  [RFI_SHLD_S0981_46R]  146.99 40.33 270 top
RFS1  S0951-46R  [RFI_SHLD_S0951_46R]  87.33 40.66 270 top
RFS2  S0951-46R  [RFI_SHLD_S0951_46R]  87.33 35.96 90 top
RFS5  S0951-46R  [RFI_SHLD_S0951_46R]  59.12 35.96 90 top
RFS6  S0951-46R  [RFI_SHLD_S0951_46R]  80.28 28.91 0 top
RFS7  S0951-46R  [RFI_SHLD_S0951_46R]  75.58 28.91 0 top
RFS8  S0951-46R  [RFI_SHLD_S0951_46R]  70.87 28.91 0 top
RFS9  S0951-46R  [RFI_SHLD_S0951_46R]  66.17 28.91 0 top
RFS10  S0951-46R  [RFI_SHLD_S0951_46R]  80.28 47.71 0 top
RFS11  S0951-46R  [RFI_SHLD_S0951_46R]  66.17 47.71 0 top
RFS12  S0951-46R  [RFI_SHLD_S0951_46R]  70.87 47.71 0 top
RFS13  S0951-46R  [RFI_SHLD_S0951_46R]  75.58 47.71 0 top
RFS14  S0951-46R  [RFI_SHLD_S0951_46R]  59.12 40.66 270 top
RFS15  S0951-46R  [RFI_SHLD_S0951_46R]  177.13 33.1 270 top
RFS16  S0951-46R  [RFI_SHLD_S0951_46R]  177.13 28.4 90 top
RFS17  S0951-46R  [RFI_SHLD_S0951_46R]  177.13 23.7 90 top
RFS18  S0951-46R  [RFI_SHLD_S0951_46R]  177.13 18.99 90 top
RFS19  S0951-46R  [RFI_SHLD_S0951_46R]  177.13 14.29 90 top
RFS20  S0951-46R  [RFI_SHLD_S0951_46R]  184.18 7.24 180 top
RFS21  S0951-46R  [RFI_SHLD_S0951_46R]  188.88 7.24 180 top
RFS22  S0951-46R  [RFI_SHLD_S0951_46R]  193.58 7.24 180 top
RFS23  S0951-46R  [RFI_SHLD_S0951_46R]  200.63 14.29 90 top
RFS24  S0951-46R  [RFI_SHLD_S0951_46R]  200.63 18.99 90 top
RFS25  S0951-46R  [RFI_SHLD_S0951_46R]  200.63 23.7 90 top
RFS26  S0951-46R  [RFI_SHLD_S0951_46R]  200.63 28.4 90 top
RFS27  S0951-46R  [RFI_SHLD_S0951_46R]  200.63 33.1 270 top
RFS28  S0951-46R  [RFI_SHLD_S0951_46R]  193.58 40.15 180 top
RFS29  S0951-46R  [RFI_SHLD_S0951_46R]  188.88 40.15 180 top
RFS30  S0951-46R  [RFI_SHLD_S0951_46R]  184.18 40.15 180 top
RFS31  S0951-46R  [RFI_SHLD_S0951_46R]  17.02 33.07 270 top
RFS32  S0951-46R  [RFI_SHLD_S0951_46R]  87.33 9.21 90 top
RFS33  S0951-46R  [RFI_SHLD_S0951_46R]  59.12 9.21 90 top
RFS34  S0951-46R  [RFI_SHLD_S0951_46R]  87.33 13.91 270 top
RFS36  S0951-46R  [RFI_SHLD_S0951_46R]  80.28 2.16 0 top
RFS37  S0951-46R  [RFI_SHLD_S0951_46R]  40.53 33.07 270 top
RFS38  S0951-46R  [RFI_SHLD_S0951_46R]  40.53 28.37 90 top
RFS39  S0951-46R  [RFI_SHLD_S0951_46R]  40.53 23.67 90 top
RFS40  S0951-46R  [RFI_SHLD_S0951_46R]  40.53 18.97 90 top
RFS41  S0951-46R  [RFI_SHLD_S0951_46R]  40.53 14.27 90 top
RFS42  S0951-46R  [RFI_SHLD_S0951_46R]  33.48 7.21 180 top
RFS43  S0951-46R  [RFI_SHLD_S0951_46R]  66.17 20.97 0 top
RFS44  S0951-46R  [RFI_SHLD_S0951_46R]  70.87 20.97 0 top
RFS45  S0951-46R  [RFI_SHLD_S0951_46R]  24.07 40.12 180 top
RFS46  S0951-46R  [RFI_SHLD_S0951_46R]  28.78 40.12 180 top
RFS47  S0951-46R  [RFI_SHLD_S0951_46R]  70.87 2.16 0 top
RFS48  S0951-46R  [RFI_SHLD_S0951_46R]  75.58 2.16 0 top
RFS49  S0951-46R  [RFI_SHLD_S0951_46R]  33.48 40.12 180 top
RFS50  S0951-46R  [RFI_SHLD_S0951_46R]  17.02 28.37 90 top
RFS51  S0951-46R  [RFI_SHLD_S0951_46R]  75.58 20.97 0 top
RFS52  S0951-46R  [RFI_SHLD_S0951_46R]  80.28 20.97 0 top
RFS54  S0951-46R  [RFI_SHLD_S0951_46R]  59.12 13.91 270 top
RFS55  S0951-46R  [RFI_SHLD_S0951_46R]  66.17 2.16 0 top
RFS56  S0951-46R  [RFI_SHLD_S0951_46R]  28.78 7.21 180 top
RFS57  S0951-46R  [RFI_SHLD_S0951_46R]  24.07 7.21 180 top
RFS58  S0951-46R  [RFI_SHLD_S0951_46R]  17.02 14.27 90 top
RFS59  S0951-46R  [RFI_SHLD_S0951_46R]  17.02 18.97 90 top
RFS60  S0951-46R  [RFI_SHLD_S0951_46R]  17.02 23.67 90 top
RFS61  S0951-46R  [RFI_SHLD_S0951_46R]  143.5 27.61 270 top
RFS62  S0951-46R  [RFI_SHLD_S0951_46R]  143.5 22.91 270 top
RFS63  S0951-46R  [RFI_SHLD_S0951_46R]  143.5 18.2 270 top
RFS64  S0951-46R  [RFI_SHLD_S0951_46R]  143.5 13.5 270 top
RFS65  S0951-46R  [RFI_SHLD_S0951_46R]  143.5 8.8 270 top
RFS66  S0951-46R  [RFI_SHLD_S0951_46R]  117.65 1.75 0 top
RFS67  S0951-46R  [RFI_SHLD_S0951_46R]  110.6 18.2 270 top
RFS68  S0951-46R  [RFI_SHLD_S0951_46R]  122.35 1.75 0 top
RFS69  S0951-46R  [RFI_SHLD_S0951_46R]  131.75 1.75 180 top
RFS70  S0951-46R  [RFI_SHLD_S0951_46R]  136.45 1.75 180 top
RFS71  S0951-46R  [RFI_SHLD_S0951_46R]  110.6 13.5 270 top
RFS72  S0951-46R  [RFI_SHLD_S0951_46R]  110.6 8.8 270 top
RFS73  S0951-46R  [RFI_SHLD_S0951_46R]  117.65 48.76 0 top
RFS74  S0951-46R  [RFI_SHLD_S0951_46R]  122.35 48.76 0 top
RFS75  S0951-46R  [RFI_SHLD_S0951_46R]  127.05 48.76 180 top
RFS76  S0951-46R  [RFI_SHLD_S0951_46R]  131.75 48.76 180 top
RFS77  S0951-46R  [RFI_SHLD_S0951_46R]  127.05 1.75 180 top
RFS78  S0951-46R  [RFI_SHLD_S0951_46R]  136.45 48.76 180 top
RFS79  S0951-46R  [RFI_SHLD_S0951_46R]  143.5 37.01 90 top
RFS80  S0951-46R  [RFI_SHLD_S0951_46R]  143.5 32.31 270 top
RFS81  S0951-46R  [RFI_SHLD_S0951_46R]  110.6 41.71 90 top
RFS82  S0951-46R  [RFI_SHLD_S0951_46R]  143.5 41.71 270 top
RFS83  S0951-46R  [RFI_SHLD_S0951_46R]  110.6 37.01 90 top
RFS84  S0951-46R  [RFI_SHLD_S0951_46R]  110.6 27.61 270 top
RFS85  S0951-46R  [RFI_SHLD_S0951_46R]  110.6 32.31 270 top
RFS86  S0951-46R  [RFI_SHLD_S0951_46R]  110.6 22.91 270 top
RFS89  S0951-46R  [RFI_SHLD_S0951_46R]  146.99 28.58 90 top
RFS90  S0951-46R  [RFI_SHLD_S0951_46R]  146.99 33.28 90 top
RFS91  S0951-46R  [RFI_SHLD_S0951_46R]  165.8 33.28 90 top
RFS92  S0951-46R  [RFI_SHLD_S0951_46R]  165.8 28.58 90 top
RFS99  S0951-46R  [RFI_SHLD_S0951_46R]  158.75 40.33 180 top
RFS104  S0951-46R  [RFI_SHLD_S0951_46R]  154.05 21.39 180 top
RFS105  S0951-46R  [RFI_SHLD_S0951_46R]  158.75 21.39 180 top
RFS106  S0951-46R  [RFI_SHLD_S0951_46R]  154.05 40.33 180 top
TP2  PROTO_HOLE  [TH_PAD]  161.04 24.64 0 top
U1  SC18IS602BIPW  [TSSOP_16]  156.38 27.6 0 top
U2  -  [WQFN_64_EP]  125.7 25.66 180 top
U3  CVHD-925X-160.000  [OSC_4P_142X914_5P3]  77.85 38.23 270 top
U4  10MHz  [OSC_6P_1347X902_6P73]  80.26 11.18 90 top
U5  LMX2594RHAT  [VQFN_40_RHA_EP4_5MM]  191.77 27.05 180 top
U7  LMX2594RHAT  [VQFN_40_RHA_EP4_5MM]  30.7 27.07 180 top
U12  IDTQS3VH253QG8  [QSOP_16_PCG16]  156.34 35.94 270 top
U13  -  [WSON065P200X200X80_7]  133.35 35.56 270 top
U14  -  [WSON065P200X200X80_7]  67.06 15.75 180 top
U15  -  [WSON065P200X200X80_7]  66.42 44.45 180 top
U16  -  [WSON065P200X200X80_7]  179.71 11.81 270 top
U17  -  [WSON065P200X200X80_7]  190.5 11.81 270 top
U18  -  [WSON065P200X200X80_7]  19.68 12.06 270 top
U19  -  [WSON065P200X200X80_7]  30.23 12.06 270 top
U20  -  [WSON065P200X200X80_7]  133.35 9.27 270 top
U21  -  [WSON065P200X200X80_7]  123.19 44.45 270 top
U22  -  [WSON065P200X200X80_7]  133.35 44.45 270 top
U23  -  [WSON065P200X200X80_7]  123.19 7.62 270 top
U24  -  [WSON065P200X200X80_7]  113.03 7.62 270 top
U25  -  [WSON065P200X200X80_7]  113.03 44.45 270 top

## Library data of the parts
C1 C55 C279 = CAP_NP: alternate symbols: (CAPC100X50X55RND); signal model: DEFAULT_CAPACITOR_100000pF_2_1
C5 C413-C415 = CAP_NP: alternate symbols: (CAPC320X160X180RND); signal model: DEFAULT_CAPACITOR_2.2e+07pF_2_1
C6 C416-C420 = CAP_NP: alternate symbols: (CAPC320X250X280RND); signal model: DEFAULT_CAPACITOR_1e+08pF_2_1
C7 C165 = CAP_NP: alternate symbols: (CAPC200X125X155RND); signal model: DEFAULT_CAPACITOR_1e+07pF_2_1
C8 C9 C39 C280 = CAP_NP: alternate symbols: (CAPC60X30X40RND)
C21 C23 C24 C26 C27 C31 C37 C40 C42 C44 C45 C47 C48 C52 C56 C58 C60 C62 C64 C67 C69 C70 C74 C76 C78-C80 C82 C83 C95 C96 C115 C117 C119 C123 C125 C128-C132 C144 C145 C281 C284 C285 C394 C395 C403-C410 C451 C452 C480 C482 C484 = CAP_NP: alternate symbols: (CAPC60X30X40RND); signal model: DEFAULT_CAPACITOR_100000pF_2_1
C25 C282 C283 C396 C397 = CAP_NP: alternate symbols: (CAPC60X30X40RND); signal model: CAP_NP_CAPC60X30X40_0.1UF_CAPC60X30X40RND_0.1UF
C41 C61 C84 C86 C93 C133 C135 C142 C163 C166 C186 C191 C358-C361 C376 C377 C379 C380 C398-C402 C411 C412 = CAP_NP: signal model: DEFAULT_CAPACITOR_1e+06pF_2_1
C43 = CAP_NP: signal model: DEFAULT_CAPACITOR_1000pF_2_1
C49 = CAP_NP: alternate symbols: (CAPC100X50X55RND); signal model: DEFAULT_CAPACITOR_3900pF_2_1
C50 = CAP_NP: alternate symbols: (CAPC100X50X55RND); signal model: DEFAULT_CAPACITOR_47.000000pF_2_1
C51 C85 C91 C92 C94 C134 C140 C141 C143 C188 C483 C485-C487 = CAP_NP: signal model: DEFAULT_CAPACITOR_1e+07pF_2_1
C53 = CAP_NP: signal model: DNP_C_0402_DNP
C54 = CAP_NP: signal model: DEFAULT_CAPACITOR_680000pF_2_1
C71 C81 C111 C118 C278 C302 C303 C305 C314 C317 C374 C378 = CAP_NP: signal model: DEFAULT_CAPACITOR_100.000000pF_2_1
C185 C187 C190 C196 C198 C200 C202 = CAP_NP: signal model: DEFAULT_CAPACITOR_10000pF_2_1
C306 C319 = CAP_NP: signal model: DEFAULT_CAPACITOR_390.000000pF_2_1
C307 C320 = CAP_NP: alternate symbols: (CAPC100X50X55RND); signal model: DEFAULT_CAPACITOR_1800pF_2_1
C308 C321 = CAP_NP: alternate symbols: (CAPC100X50X55RND); signal model: DNP_C_0402_DNP
C309 C318 = CAP_NP: alternate symbols: (CAPC100X50X55RND); signal model: DEFAULT_CAPACITOR_68000pF_2_1
C322 C324 C327 C328 C330 C333 C335 C336 C339 C341 C342 C344 C346 C348 C351 C352 C354 C357 C362 C364 C367 C368 C370 C373 C382 C384 C387 C388 C390 C393 C454 C457 C460 C463 C467 C470 C473 C476 C478 = CAP_NP: alternate symbols: (CAPC100X50X55RND); signal model: DEFAULT_CAPACITOR_2.2e+06pF_2_1
C323 C325 C326 C329 C331 C332 C334 C337 C338 C340 C343 C345 C347 C349 C350 C353 C355 C356 C363 C365 C366 C369 C371 C372 C383 C385 C386 C389 C391 C392 C455 C458 C459 C464 C468 C471 C472 C474 C475 = CAP_NP: alternate symbols: ((0402,C402-25,CAPC100X50X55L25NRND,CAPC100X50X55L30NRND,CAPC100X50X55L30N)); signal model: DEFAULT_CAPACITOR_220000pF_2_1
C421 C423 C425 C427 C429 C432 C435 C437 C439 C441 C453 C462 C466 = CAP_NP: alternate symbols: (CAPC160X80X95RND); signal model: DEFAULT_CAPACITOR_4.7e+06pF_2_1
C422 C424 C426 C428 C430 C431 C433 C434 C436 C438 C440 C442-C450 C456 C461 C465 C469 C477 C479 = CAP_NP: alternate symbols: (CAPC100X50X70RND); signal model: DEFAULT_CAPACITOR_4.7e+06pF_2_1
DS1-DS4 = LED
E2 = GND_LUG2
J1 = LPAM-20-xx.x-x-06-x-x-xx
J10 J11 J20 J21 J27-J32 J42 = SMA-5PIN
J24 J26 J34 J36-J38 J41 = HDR_1X2_B
J33 = SHROUDED_HDR_2X5
L3 L33 = IND
L5 L8 L11 L12 L19 = IND: signal model: DEFAULT_INDUCTOR_47.000000nH_2_1
L6 L34-L37 = IND: signal model: DEFAULT_INDUCTOR_15.000000nH_2_1
L13 L15-L18 = IND: signal model: DEFAULT_INDUCTOR_1900nH_2_1
L20 = IND: signal model: DEFAULT_INDUCTOR_10000nH_2_1
L21-L24 L27-L30 = IND: signal model: DEFAULT_INDUCTOR_1.200000nH_2_1
L25 L26 = IND: signal model: DEFAULT_INDUCTOR_36.000000nH_2_1
L31 L32 = IND: signal model: DEFAULT_INDUCTOR_6.200000nH_2_1
MH1-MH3 = HOLE
R1 R2 R8-R10 R12 R13 R19 R20 R149 R151 R218-R220 = RES: alternate symbols: (RESC100X50X40RND); signal model: DNP_R_0402_DNP
R3 R5-R7 R148 R150 R221-R223 = RES: alternate symbols: (RESC100X50X40RND); signal model: DEFAULT_RESISTOR_10000OHM_2_1
R4 = RES: alternate symbols: (RESC100X50X40RND); signal model: DEFAULT_RESISTOR_2000OHM_2_1
R22 R49 R153 R224 = RES
R23 R26 R27 R33 R34 R225-R227 R229 R230 R272-R275 = RES: signal model: DEFAULT_RESISTOR_240.000000OHM_2_1
R48 = RES: alternate symbols: (RESC60X30X26RND)
R51 R66 = RES: signal model: DEFAULT_RESISTOR_38.300000OHM_2_1
R52 R53 R60 R63 R65 R113 R155 R158-R160 R285 = RES: signal model: DNP_R_0402_DNP
R54 R67 = RES: signal model: DEFAULT_RESISTOR_49.900000OHM_2_1
R55 R56 R64 R233 R239 R242-R247 R286 R288 = RES: alternate symbols: (RESC100X50X40RND); signal model: DEFAULT_RESISTOR_0.001OHM_2_1
R57 = RES: alternate symbols: ((0402,C402-25,RESC100X50X40L25NRND)); signal model: DEFAULT_RESISTOR_619.000000OHM_2_1
R58 = RES: signal model: DEFAULT_RESISTOR_39000OHM_2_1
R59 = RES: signal model: DEFAULT_RESISTOR_17.800000OHM_2_1
R61 R62 = RES: alternate symbols: (RESC100X50X40RND); signal model: DEFAULT_RESISTOR_270.000000OHM_2_1
R73 R107 R277 = RES: signal model: DEFAULT_RESISTOR_100.000000OHM_2_1
R109 R110 R112 R147 = RES: alternate symbols: (RESC100X50X40RND); signal model: DEFAULT_RESISTOR_330.000000OHM_2_1
R171 R179 R184 R276 R278-R280 R283 R284 R287 = RES: alternate symbols: (RESC60X30X26RND); signal model: DEFAULT_RESISTOR_0.001OHM_2_1
R172-R174 R176-R178 R181-R183 R228 R236 = RES: signal model: DEFAULT_RESISTOR_12000OHM_2_1
R215-R217 = RES: alternate symbols: (RESC100X50X40RND); signal model: DEFAULT_RESISTOR_49.900000OHM_2_1
R234 R240 = RES: signal model: DEFAULT_RESISTOR_18.000000OHM_2_1
R235 R241 = RES: signal model: DEFAULT_RESISTOR_68.100000OHM_2_1
R249 R252 R255 R258 R261 R264 R267 R270 = RES: signal model: DEFAULT_RESISTOR_24.900000OHM_2_1
R281 R282 = RES: alternate symbols: (RESC100X50X40RND); signal model: 0_0402_0
RFC1-RFC24 = S0981-46R
RFS1 RFS2 RFS5-RFS34 RFS36-RFS52 RFS54-RFS86 RFS89-RFS92 RFS99 RFS104-RFS106 = S0951-46R
TP2 = PROTO_HOLE
U1 = SC18IS602BIPW
U2 = LMK04828B
U3 = VCXO_160M00_DUAL
U4 = TCXO_10M00_DUAL
U5 U7 = LMX2594
U12 = IDTQS3VH253QG8
U13-U25 = LP5912-3.3DRVT

## Footprints (pads in the part's own frame, mm; a bottom-side part is the same pattern mirrored in y, then rotated)
32K10K_400_3M_73251_DUAL
  round 1.397 smd: 1(0,0)
  round 2.362 hole 1.6: 2(-2.54,2.54) 3(-2.54,-2.54) 4(2.54,2.54) 5(2.54,-2.54)
0201
  rect 0.275x0.33 smd: 1(-0.263,0) 2(0.263,0)
0402
  rect 0.5x0.51 smd: 1(-0.45,0) 2(0.45,0)
BEAD_LAIRD_1206
  rect 1.778x2.057 smd: 1(-1.445,0) 2(1.445,0)
CAPC60X30X33
  rect 0.275x0.33 smd: 1(-0.263,0) 2(0.263,0)
CAPC60X30X40
  rect 0.275x0.33 smd: 1(-0.263,0) 2(0.263,0)
CAPC100X50X50
  rect 0.5x0.51 smd: 1(-0.45,0) 2(0.45,0)
CAPC100X50X55
  rect 0.5x0.51 smd: 1(-0.45,0) 2(0.45,0)
CAPC100X50X56
  rect 0.5x0.51 smd: 1(-0.45,0) 2(0.45,0)
CAPC100X50X70
  rect 0.5x0.51 smd: 1(-0.45,0) 2(0.45,0)
CAPC160X80X95
  rect 0.71x0.81 smd: 1(-0.645,0) 2(0.645,0)
CAPC200X125X155
  rect 0.98x1.32 smd: 1(-0.78,0) 2(0.78,0)
CAPC320X160X180
  rect 1.145x1.65 smd: 1(-1.333,0) 2(1.333,0)
CAPC320X250X280
  rect 1.145x2.59 smd: 1(-1.333,0) 2(1.333,0)
CON_SAMTEC_FTSH_10
  rect 0.737x2.794 smd: 1(-2.54,-2.032) 2(-2.54,2.032) 3(-1.27,-2.032) 4(-1.27,2.032) 5(0,-2.032) 6(0,2.032) 7(1.27,-2.032) 8(1.27,2.032) 9(2.54,-2.032) 10(2.54,2.032)
CON_SAMTEC_LPAM_20
  round 1.45 hole 1.448 unplated: (-14.25,-2.03) (14.25,0)
  round 0.64 smd: A1(-12.065,-3.05) A2(-10.795,-3.05) A3(-9.525,-3.05) A4(-8.255,-3.05) A5(-6.985,-3.05) A6(-5.715,-3.05) A7(-4.445,-3.05) A8(-3.175,-3.05) A9(-1.905,-3.05) A10(-0.635,-3.05) A11(0.635,-3.05) A12(1.905,-3.05) A13(3.175,-3.05) A14(4.445,-3.05) A15(5.715,-3.05) A16(6.985,-3.05) A17(8.255,-3.05) A18(9.525,-3.05) A19(10.795,-3.05) A20(12.065,-3.05) B1(-12.065,-1.78) B2(-10.795,-1.78) B3(-9.525,-1.78) B4(-8.255,-1.78) B5(-6.985,-1.78) B6(-5.715,-1.78) B7(-4.445,-1.78) B8(-3.175,-1.78) B9(-1.905,-1.78) B10(-0.635,-1.78) B11(0.635,-1.78) B12(1.905,-1.78) B13(3.175,-1.78) B14(4.445,-1.78) B15(5.715,-1.78) B16(6.985,-1.78) B17(8.255,-1.78) B18(9.525,-1.78) B19(10.795,-1.78) B20(12.065,-1.78) C1(-12.065,-0.51) C2(-10.795,-0.51) C3(-9.525,-0.51) C4(-8.255,-0.51) C5(-6.985,-0.51) C6(-5.715,-0.51) C7(-4.445,-0.51) C8(-3.175,-0.51) C9(-1.905,-0.51) C10(-0.635,-0.51) C11(0.635,-0.51) C12(1.905,-0.51) C13(3.175,-0.51) C14(4.445,-0.51) C15(5.715,-0.51) C16(6.985,-0.51) C17(8.255,-0.51) C18(9.525,-0.51) C19(10.795,-0.51) C20(12.065,-0.51) D1(-12.065,0.76) D2(-10.795,0.76) D3(-9.525,0.76) D4(-8.255,0.76) D5(-6.985,0.76) D6(-5.715,0.76) D7(-4.445,0.76) D8(-3.175,0.76) D9(-1.905,0.76) D10(-0.635,0.76) D11(0.635,0.76) D12(1.905,0.76) D13(3.175,0.76) D14(4.445,0.76) D15(5.715,0.76) D16(6.985,0.76) D17(8.255,0.76) D18(9.525,0.76) D19(10.795,0.76) D20(12.065,0.76) E1(-12.065,2.03) E2(-10.795,2.03) E3(-9.525,2.03) E4(-8.255,2.03) E5(-6.985,2.03) E6(-5.715,2.03) E7(-4.445,2.03) E8(-3.175,2.03) E9(-1.905,2.03) E10(-0.635,2.03) E11(0.635,2.03) E12(1.905,2.03) E13(3.175,2.03) E14(4.445,2.03) E15(5.715,2.03) E16(6.985,2.03) E17(8.255,2.03) E18(9.525,2.03) E19(10.795,2.03) E20(12.065,2.03) F1(-12.065,3.3) F2(-10.795,3.3) F3(-9.525,3.3) F4(-8.255,3.3) F5(-6.985,3.3) F6(-5.715,3.3) F7(-4.445,3.3) F8(-3.175,3.3) F9(-1.905,3.3) F10(-0.635,3.3) F11(0.635,3.3) F12(1.905,3.3) F13(3.175,3.3) F14(4.445,3.3) F15(5.715,3.3) F16(6.985,3.3) F17(8.255,3.3) F18(9.525,3.3) F19(10.795,3.3) F20(12.065,3.3)
CONN_CARLISE_TM14_0084_00
  round 0.5 smd: 1(0,0)
  round 0.9 hole 0.584: 2(-1.079,-1.079) 3(1.079,-1.079) 4(1.079,1.079) 5(-1.079,1.079)
HDR_1X2_1P27
  rect 0.965x0.965 hole 0.711: 1(0,0)
  round 0.965 hole 0.711: 2(1.27,0)
IND_COILCRAFT_1008AF_103XJLC
  rect 1.02x2.54 smd: 1(-1.145,0) 2(1.145,0)
IND_COILCRAFT_1008AF_192XJLB
  rect 1.02x2.54 smd: 1(-1.145,0) 2(1.145,0)
INDC58X46X45
  rect 0.275x0.33 smd: 1(-0.263,0) 2(0.263,0)
INDC180X112X102
  rect 0.64x1.02 smd: 1(-0.64,0) 2(0.64,0)
LED_0603
  rect 0.71x0.81 smd: 1(-0.645,0) 2(0.645,0)
MH_220HN135
  round 6.35 hole 3.429 unplated: (0,0)
OSC_4P_142X914_5P3
  rect 1.27x2.28 smd: (0,3.55) (0.01,-3.55) 1(-2.54,-3.555) 2(2.54,-3.555) 3(2.54,3.555) 4(-2.54,3.555)
OSC_6P_1347X902_6P73
  rect 1.52x2.03 smd: 1(-2.54,-3.685) 2(0,-3.685) 3(2.54,-3.685) 4(2.54,3.685) 5(0,3.685) 6(-2.54,3.685)
QSOP_16_PCG16
  rect 0.355x1.675 smd: 1(-2.223,-2.692) 2(-1.587,-2.692) 3(-0.953,-2.692) 4(-0.318,-2.692) 5(0.318,-2.692) 6(0.953,-2.692) 7(1.587,-2.692) 8(2.223,-2.692) 9(2.223,2.692) 10(1.587,2.692) 11(0.953,2.692) 12(0.318,2.692) 13(-0.318,2.692) 14(-0.953,2.692) 15(-1.587,2.692) 16(-2.223,2.692)
RESC60X30X23
  rect 0.275x0.33 smd: 1(-0.263,0) 2(0.263,0)
RESC60X30X26
  rect 0.275x0.33 smd: 1(-0.263,0) 2(0.263,0)
RESC100X50X40
  rect 0.5x0.51 smd: 1(-0.45,0) 2(0.45,0)
RFI_SHLD_S0951_46R
  rect 1.1x1.2 smd: 1(0,0)
  rect 0.7x0.5 smd: 2(-1.1,0) 3(1.1,0)
  rect 0.48x0.5 smd: 4(-1.81,0) 5(1.81,0)
RFI_SHLD_S0981_46R
  rect 1x0.8 smd: 1(0,4)
  rect 0.8x1 smd: 2(4,0)
  custom 2.1x2.1 smd: 3(-0.5,-0.5)
TH_PAD
  round 0.61 hole 0.305: 1(0,0)
TP_CONCORD_10_109
  round 3.962 hole 2.388: 1(0,0)
TSSOP_16
  rect 1.6x0.35 smd: 1(-2.875,2.275) 2(-2.875,1.625) 3(-2.875,0.975) 4(-2.875,0.325) 5(-2.875,-0.325) 6(-2.875,-0.975) 7(-2.875,-1.625) 8(-2.875,-2.275) 9(2.875,-2.275) 10(2.875,-1.625) 11(2.875,-0.975) 12(2.875,-0.325) 13(2.875,0.325) 14(2.875,0.975) 15(2.875,1.625) 16(2.875,2.275)
VQFN_40_RHA_EP4_5MM
  rect 0.851x0.279 smd: 1(-2.975,2.25) 2(-2.975,1.75) 3(-2.975,1.25) 4(-2.975,0.75) 5(-2.975,0.25) 6(-2.975,-0.25) 7(-2.975,-0.75) 8(-2.975,-1.25) 9(-2.975,-1.75) 10(-2.975,-2.25) 21(2.975,-2.25) 22(2.975,-1.75) 23(2.975,-1.25) 24(2.975,-0.75) 25(2.975,-0.25) 26(2.975,0.25) 27(2.975,0.75) 28(2.975,1.25) 29(2.975,1.75) 30(2.975,2.25)
  rect 0.279x0.851 smd: 11(-2.25,-2.975) 12(-1.75,-2.975) 13(-1.25,-2.975) 14(-0.75,-2.975) 15(-0.25,-2.975) 16(0.25,-2.975) 17(0.75,-2.975) 18(1.25,-2.975) 19(1.75,-2.975) 20(2.25,-2.975) 31(2.25,2.975) 32(1.75,2.975) 33(1.25,2.975) 34(0.75,2.975) 35(0.25,2.975) 36(-0.25,2.975) 37(-0.75,2.975) 38(-1.25,2.975) 39(-1.75,2.975) 40(-2.25,2.975)
  rect 4.496x4.496 smd: 41(0,0)
WQFN_64_EP
  rect 0.61x0.254 smd: 1(-4.4,3.75) 2(-4.4,3.25) 3(-4.4,2.75) 4(-4.4,2.25) 5(-4.4,1.75) 6(-4.4,1.25) 7(-4.4,0.75) 8(-4.4,0.25) 9(-4.4,-0.25) 10(-4.4,-0.75) 11(-4.4,-1.25) 12(-4.4,-1.75) 13(-4.4,-2.25) 14(-4.4,-2.75) 15(-4.4,-3.25) 16(-4.4,-3.75) 33(4.4,-3.75) 34(4.4,-3.25) 35(4.4,-2.75) 36(4.4,-2.25) 37(4.4,-1.75) 38(4.4,-1.25) 39(4.4,-0.75) 40(4.4,-0.25) 41(4.4,0.25) 42(4.4,0.75) 43(4.4,1.25) 44(4.4,1.75) 45(4.4,2.25) 46(4.4,2.75) 47(4.4,3.25) 48(4.4,3.75)
  rect 0.254x0.61 smd: 17(-3.75,-4.4) 18(-3.25,-4.4) 19(-2.75,-4.4) 20(-2.25,-4.4) 21(-1.75,-4.4) 22(-1.25,-4.4) 23(-0.75,-4.4) 24(-0.25,-4.4) 25(0.25,-4.4) 26(0.75,-4.4) 27(1.25,-4.4) 28(1.75,-4.4) 29(2.25,-4.4) 30(2.75,-4.4) 31(3.25,-4.4) 32(3.75,-4.4) 49(3.75,4.4) 50(3.25,4.4) 51(2.75,4.4) 52(2.25,4.4) 53(1.75,4.4) 54(1.25,4.4) 55(0.75,4.4) 56(0.25,4.4) 57(-0.25,4.4) 58(-0.75,4.4) 59(-1.25,4.4) 60(-1.75,4.4) 61(-2.25,4.4) 62(-2.75,4.4) 63(-3.25,4.4) 64(-3.75,4.4)
  rect 7.163x7.163 smd: 65(0,0)
WSON065P200X200X80_7
  rrect 0.45x0.3 smd: 1(-0.975,0.65) 2(-0.975,0) 3(-0.975,-0.65) 4(0.975,-0.65) 5(0.975,0) 6(0.975,0.65)
  rrect 1x1.6 smd: 7(0,0)

## Nets
